# Altium PCB BOARD.PcbDoc
Units mm, origin at the board's own origin, x right, y up, seen from the top; angles counter-clockwise.
Board outline 50 x 40 mm, 2 copper layers (Top Layer, Bottom Layer), stack 1.061 mm thick; 81 components, 50 nets, 255 pads, 332 vias.
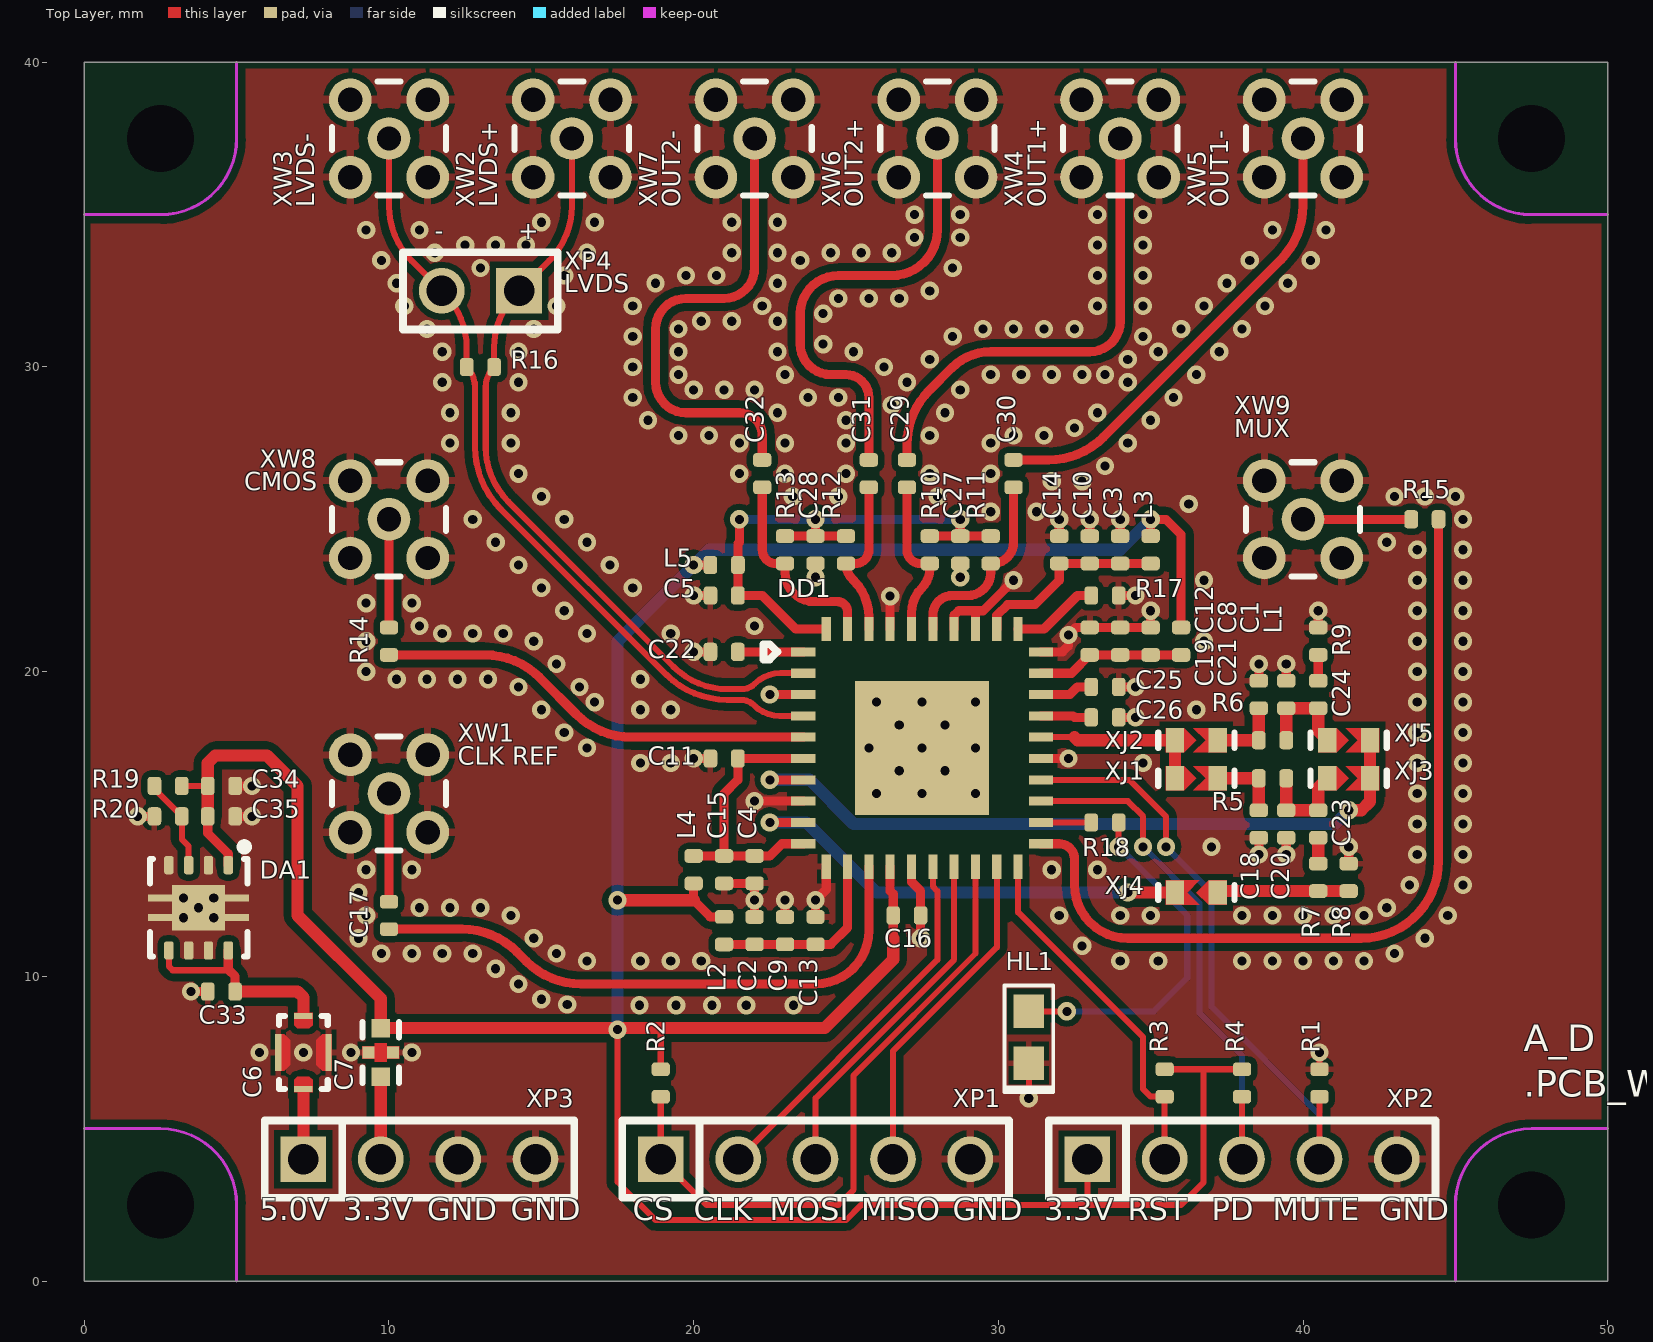
[diagram p0: Top Layer view]
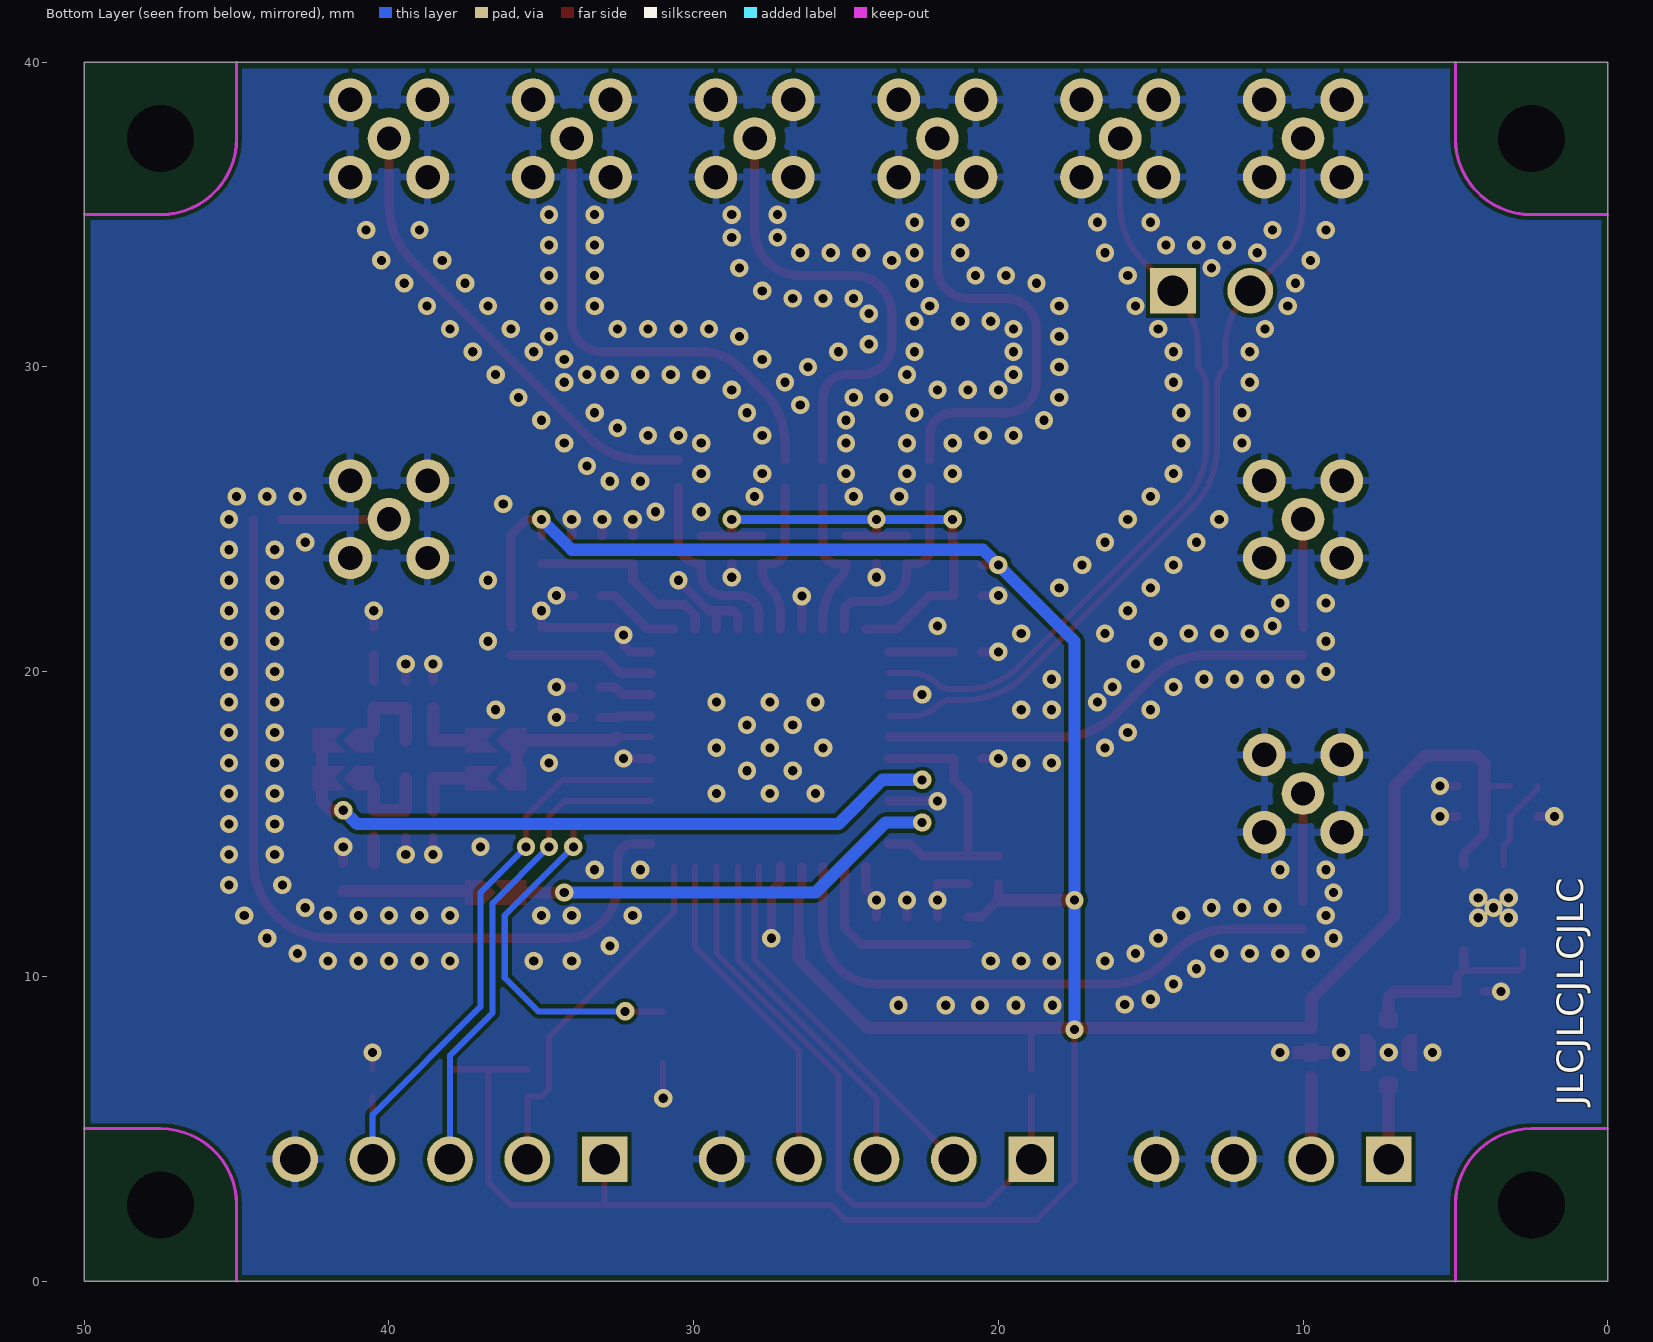
[diagram p1: Bottom Layer view, seen from below]
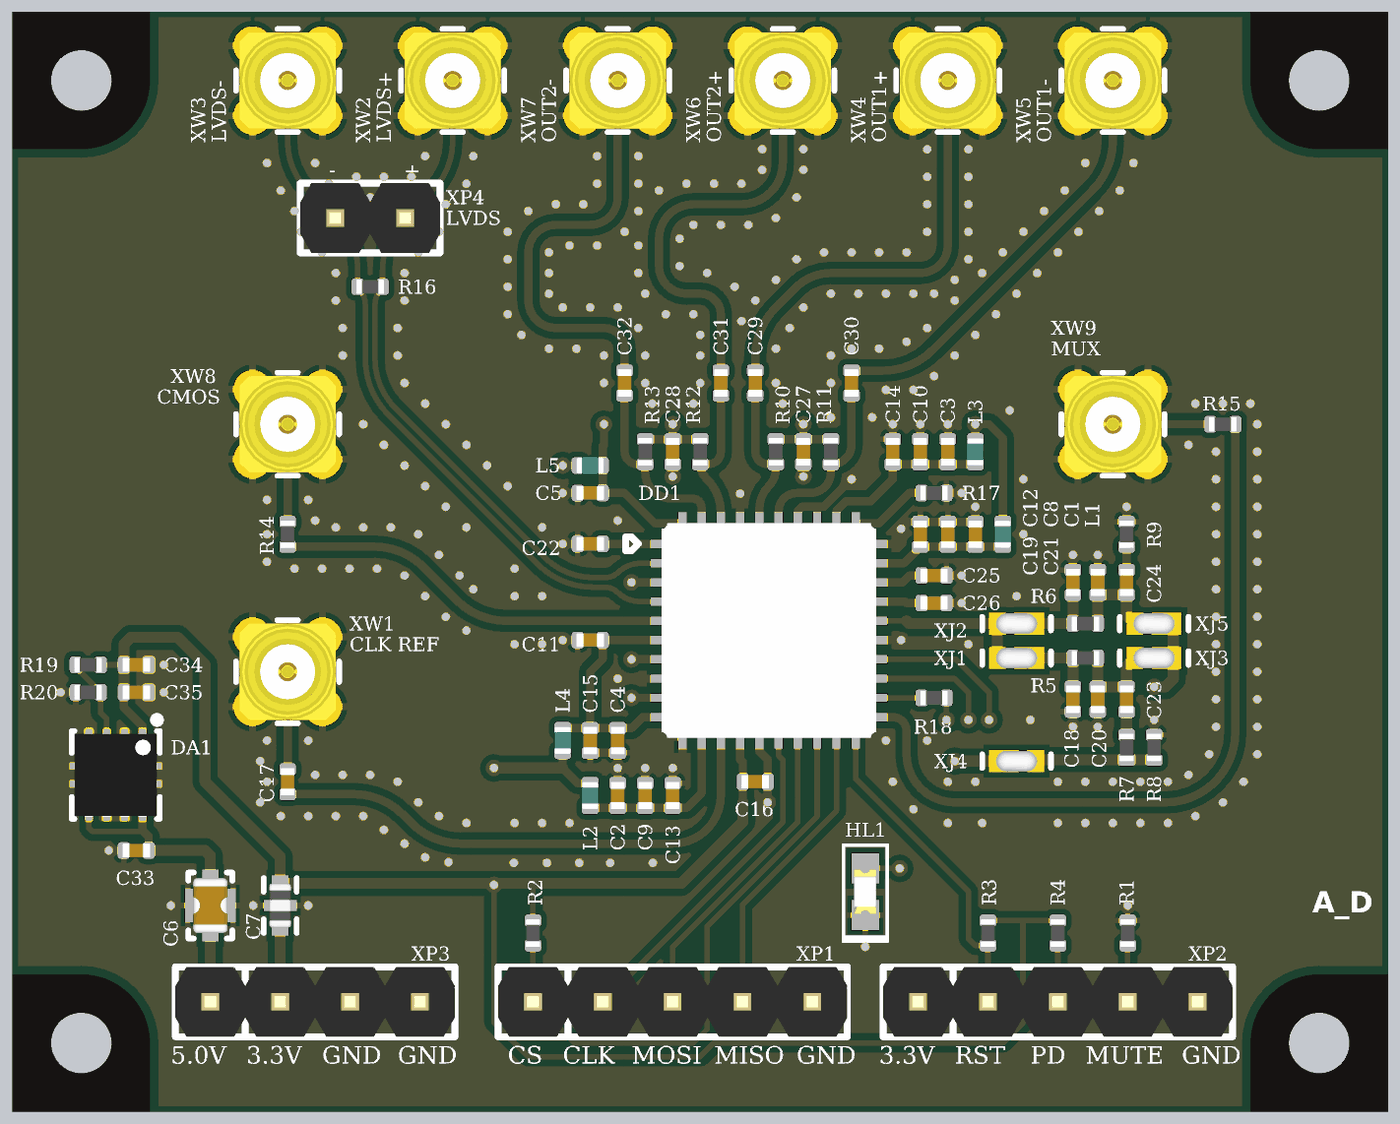
[diagram p2: 3D render of the assembled board from above, using the file's embedded part models]

## Layer stack, top to bottom
Top Solder: solder mask 0.01, Solder Resist, Dk 3.5
Top Layer: signal copper 0.0356
Dielectric1: core 0.99, KB-6160-0,99, Dk 4.6
Bottom Layer: signal copper 0.0356
Bottom Solder: solder mask 0.01, Solder Resist, Dk 3.5

## Board outline
0,0 0,40 50,40 50,0

## Design rules (kind name [scope] priority, off if disabled: settings)
BoardOutlineClearance [All] p1: gap=0.2 ignorepadtopadclearanceinfootprint=FALSE
Clearance Clearance_Top [OnLayer('Top Layer')] p1: gap=0.127 ignorepadtopadclearanceinfootprint=FALSE except(0.2: SMDPad-Fill SMDPad-Poly SMDPad-Region THPad-Fill THPad-Poly THPad-Region Via-Fill Via-Poly Via-Region Fill-Fill Fill-Poly Fill-Region Poly-Poly Poly-Region Region-Region; 0.25: Arc-Fill Arc-Poly Arc-Region Track-Fill Track-Poly Track-Region)
Clearance [All] p2: gap=0.127 ignorepadtopadclearanceinfootprint=FALSE
ComponentClearance [All] p1 off: gap=0.25 collisioncheckmode=3 verticalgap=0.25 showdistances=FALSE
DiffPairsRouting [All] p1: maxlimit=0.15 minlimit=0.15 mostfreqgap=0.15 toplayer_minwidth=0.2 toplayer_maxwidth=0.2 toplayer_prefwidth=0.2 bottomlayer_minwidth=0.2 bottomlayer_maxwidth=0.2 bottomlayer_prefwidth=0.2 impedanceprofiledriven=TRUE impedanceprofileid={279581DC-196B-4635-8583-721C73297865} impedanceprofilevalue=100.000000 maxuncoupledlength=35
Height [All] p1: minheight=0 maxheight=25 prefheight=25
HoleSize [All] p1: absolutevalues=TRUE maxlimit=6 minlimit=0.3 maxpercent=80.000 minpercent=20.000
HoleToHoleClearance [All] p1: gap=0.25 allowstackedmicrovias=TRUE
MatchedLengths MatchedLengths_COUT [InNetClass('COUT')] p1: tolerance=0.5 checknetsindiffpair=FALSE checkdiffpairvsdiffpair=TRUE checkxsignals=TRUE checkothers=TRUE
MatchedLengths MatchedLengths_LCD [InDifferentialPairClass('LCD')] p2: tolerance=5 checknetsindiffpair=FALSE checkdiffpairvsdiffpair=TRUE checkxsignals=TRUE checkothers=TRUE
MatchedLengths MatchedLengths_MIPI [InDifferentialPairClass('MIPI')] p3: tolerance=5 checknetsindiffpair=FALSE checkdiffpairvsdiffpair=TRUE checkxsignals=TRUE checkothers=TRUE
MatchedLengths [InDifferentialPairClass('All Differential Pairs')] p4: tolerance=3 checknetsindiffpair=TRUE checkdiffpairvsdiffpair=FALSE checkxsignals=FALSE checkothers=FALSE
MinimumSolderMaskSliver [All] p1 off: minsoldermaskwidth=0.254
PlaneClearance [All] p1: clearance=0.5
PlaneConnect [All] p1: planeconnectstyle=Relief reliefexpansion=0.5 reliefentries=4 reliefconductorwidth=0.25 reliefairgap=0.25
PolygonConnect PolygonConnect_DirectConnect [InComponentClass('DirectConnect')] p1: connectstyle=Direct reliefconductorwidth=0.254 reliefentries=4 polygonreliefangle="90 Angle" airgapwidth=0.254
PolygonConnect [All] p2: thpad.connectstyle=Relief thpad.reliefconductorwidth=0.25 thpad.reliefentries=4 thpad.polygonreliefangle="90 Angle" thpad.airgapwidth=0.2 smdpad.connectstyle=Relief smdpad.reliefconductorwidth=0.2 smdpad.reliefentries=4 smdpad.polygonreliefangle="90 Angle" smdpad.airgapwidth=0.15 via.connectstyle=Direct via.reliefconductorwidth=0.254 via.reliefentries=4 via.polygonreliefangle="90 Angle" via.airgapwidth=0.254
RoutingCorners [All] p1: cornerstyle=45-Degree minsetback=1.5 maxsetback=3.5
RoutingVias [All] p1: holewidth=0.6 width=1.2 viastyle="Through Hole" minholewidth=0.3 minwidth=0.5 maxholewidth=1 maxwidth=2
SMDEntry [All] p1: side=TRUE corner=TRUE anyangle=TRUE
SilkToSilkClearance [All] p1 off: silktosilkclearance=0.254
SilkToSolderMaskClearance [IsPad] p1 off: minsilkscreentomaskgap=0.254 clearancetoexposedcopper=TRUE
SolderMaskExpansion [All] p1: expansion=0.025
Width Width_50 [InNetClass('50OHM')] p1: maxlimit=1.3 minlimit=0.3 preferedwidth=0.3 minimp=50.000000 maximp=50.000000 favimp=50.000000
Width [All] p2: maxlimit=8 minlimit=0.15 preferedwidth=0.6
Width Width_TrackEnds [All] p3 off: maxlimit=0.25 minlimit=0.25 preferedwidth=0.25 checkconnectedcopper=TRUE
19 further rules are at their usual default settings.

## Classes and differential pairs
net class COUT: COUT1_N COUT1_P COUT2_N COUT2_P
net class SPI: SPI_CLK SPI_CS_N SPI_MISO SPI_MOSI
component class DirectConnect: C34 C35 DA1
differential pair class OUT: OUT1 OUT2 OUT_LVDS
net class 50OHM: CLK_REF COUT1_N COUT1_P COUT2_N COUT2_P NetC17_1 OUT1_N OUT1_P OUT2_N OUT2_P OUT_CMOS OUT_CMOS_C OUT_MUX OUT_MUX_C
differential pair OUT_LVDS: +OUT_LVDS_P -OUT_LVDS_N

## Components (designator, comment, footprint, x,y, rotation, side; value= is the part's Value field where it differs from the comment)
C1 "Capacitor" C0402_L 35,21 r270 top value=1uF
C2 "Capacitor" C0402_L 22,11.5 r270 top value=1uF
C3 "Capacitor" C0402_L 34,24 r270 top value=1uF
C4 "Capacitor" C0402_L 22,13.5 r90 top value=1uF
C5 "Capacitor" C0402_L 21,22.5 r0 top value=1uF
C6 "CAP-FT_123" NFM21PC 7.19,7.5 r90 top value=0.47uF
C7 "CAP-FT_123" NFM18PC_H080-Series 9.73,7.5 r90 top value=1.0uF
C8 "Capacitor" C0402_L 34,21 r270 top value=0.1uF
C9 "Capacitor" C0402_L 23,11.5 r270 top value=0.1uF
C10 "Capacitor" C0402_L 33,24 r270 top value=0.1uF
C11 "Capacitor" C0402_L 21,17.15 r0 top value=0.1uF
C12 "Capacitor" C0402_L 33,21 r270 top value=0.01uF
C13 "Capacitor" C0402_L 24,11.5 r270 top value=100pF
C14 "Capacitor" C0402_L 32,24 r270 top value=100pF
C15 "Capacitor" C0402_L 21,13.5 r90 top value=100pF
C16 "Capacitor" C0402_L 27,12 r180 top value=1uF
C17 "Capacitor" C0402_L 10,12 r90 top value=0.1uF
C18 "Capacitor" C0402_L 38.55,15 r90 top value=470pF
C19 "Capacitor" C0402_L 38.55,19.25 r270 top value=470pF
C20 "Capacitor" C0402_L 39.45,15 r90 top value=470pF
C21 "Capacitor" C0402_L 39.45,19.25 r270 top value=3300pF
C22 "Capacitor" C0402_L 21,20.65 r0 top value=0.01uF
C23 "Capacitor" C0402_L 40.5,15 r90 top value=0.033uF
C24 "Capacitor" C0402_L 40.5,19.25 r270 top value=0.1uF
C25 "Capacitor" C0402_L 33.5,19.5 r180 top value=0.1uF
C26 "Capacitor" C0402_L 33.5,18.5 r180 top value=0.1uF
C27 "Capacitor" C0402_L 28.75,24 r90 top value=0.01uF
C28 "Capacitor" C0402_L 24,24 r90 top value=0.01uF
C29 "Capacitor" C0402_L 27,26.5 r270 top value=0.01uF
C30 "Capacitor" C0402_L 30.5,26.5 r270 top value=0.01uF
C31 "Capacitor" C0402_L 25.75,26.5 r270 top value=0.01uF
C32 "Capacitor" C0402_L 22.25,26.5 r270 top value=0.01uF
C33 "Capacitor" C0402_L 4.5,9.5 r0 top value=1uF
C34 "Capacitor" C0402_L 4.5,16.25 r180 top value=4.7uF
C35 "Capacitor" C0402_L 4.5,15.25 r180 top value=4.7uF
DA1 "TPS73501DRB" VSON-8_065P300X300X100_N 3.75,12.25 r180 top value=TPS73501DRBR
DD1 "1508МТ015" 5164.40-1H3 27.5,17.5 r270 top locked
HL1 "Text" LD0603 31,8 r270 top value=BL-LS0603GC
L1 "FerriteBead" L0402_L 36,21 r270 top value=BLM15HD102SN1D
L2 "FerriteBead" L0402_L 21,11.5 r270 top value=BLM15HD102SN1D
L3 "FerriteBead" L0402_L 35,24 r270 top value=BLM15HD102SN1D
L4 "FerriteBead" L0402_L 20,13.5 r90 top value=BLM15HD102SN1D
L5 "FerriteBead" L0402_L 21,23.5 r0 top value=BLM15HD102SN1D
R1 "Resistor" R0402_L 40.54,6.5 r90 top value=100k
R2 "Resistor" R0402_L 18.92,6.5 r90 top value=100k
R3 "Resistor" R0402_L 35.46,6.5 r90 top value=100k
R4 "Resistor" R0402_L 38,6.5 r90 top value=100k
R5 "Resistor" R0402_L 39,16.5 r0 top value=1k
R6 "Resistor" R0402_L 39,17.75 r0 top value=1k
R7 "Resistor" R0402_L 40.5,13.25 r90 top value=499
R8 "Resistor" R0402_L 41.5,13.25 r270 top value=1k
R9 "Resistor" R0402_L 40.5,21 r270 top value=499
R10 "Resistor" R0402_L 27.75,24 r90 top value=49.9
R11 "Resistor" R0402_L 29.75,24 r90 top value=49.9
R12 "Resistor" R0402_L 25,24 r90 top value=49.9
R13 "Resistor" R0402_L 23,24 r90 top value=49.9
R14 "Resistor" R0402_L 10,21 r90 top value=100
R15 "Resistor" R0402_L 44,25 r180 top value=100
R16 "Resistor" R0402_L 13,30 r0 top value=100
R17 "Resistor" R0402_L 33.5,22.5 r180 top value=5.1k
R18 "Resistor" R0402_L 33.5,15.05 r180 top value=1k
R19 "Resistor" R0402_L 2.75,16.25 r0 top value=22.1k
R20 "Resistor" R0402_L 2.75,15.25 r0 top value=12k
XJ1 "Text" JS-S0603-2x 36.5,16.5 r0 top value=SolderJumper-SMT
XJ2 "Text" JS-S0603-2x 36.5,17.75 r0 top value=SolderJumper-SMT
XJ3 "Text" JS-S0603-2x 41.5,16.5 r0 top value=SolderJumper-SMT
XJ4 "Text" JS-S0603-2x 36.5,12.75 r180 top value=SolderJumper-SMT
XJ5 "Text" JS-S0603-2x 41.5,17.75 r0 top value=SolderJumper-SMT
XP1 "SPI" PLS-5 24,4 r0 top value=PLS-5
XP2 "CTRL" PLS-5 38,4 r0 top value=PLS-5
XP3 "POWER" PLS-4 11,4 r0 top value=PLS-4
XP4 "LVDS" PLS-2 13,32.5 r180 top value=PLS-2
XW1 "CLK REF" MMCX-J-ST-TH1 10,16 r0 top value=MMCX-J-H-ST-TH1
XW2 "LVDS+" MMCX-J-ST-TH1 16,37.5 r0 top value=MMCX-J-H-ST-TH1
XW3 "LVDS-" MMCX-J-ST-TH1 10,37.5 r0 top value=MMCX-J-H-ST-TH1
XW4 "OUT1+" MMCX-J-ST-TH1 34,37.5 r0 top value=MMCX-J-H-ST-TH1
XW5 "OUT1-" MMCX-J-ST-TH1 40,37.5 r0 top value=MMCX-J-H-ST-TH1
XW6 "OUT2+" MMCX-J-ST-TH1 28,37.5 r0 top value=MMCX-J-H-ST-TH1
XW7 "OUT2-" MMCX-J-ST-TH1 22,37.5 r0 top value=MMCX-J-H-ST-TH1
XW8 "CMOS" MMCX-J-ST-TH1 10,25 r0 top value=MMCX-J-H-ST-TH1
XW9 "MUX" MMCX-J-ST-TH1 40,25 r0 top value=MMCX-J-H-ST-TH1

## Footprints (in the part's own frame and the unit in brackets; to place one, negate y for a bottom-side part, rotate by r counter-clockwise, add the part's x,y. Pads: shape width x height; smd on the part's side, far side on the other; paste and mask are expansions set on the pad)
5164.40-1H3 [mm]
  rect 0.3x0.8 smd: 1(-3.15,-3.9) 2(-2.45,-3.9) 3(-1.75,-3.9) 4(-1.05,-3.9) 5(-0.35,-3.9) 6(0.35,-3.9) 7(1.05,-3.9) 8(1.75,-3.9) 9(2.45,-3.9) 10(3.15,-3.9) 21(3.15,3.9) 22(2.45,3.9) 23(1.75,3.9) 24(1.05,3.9) 25(0.35,3.9) 26(-0.35,3.9) 27(-1.05,3.9) 28(-1.75,3.9) 29(-2.45,3.9) 30(-3.15,3.9)
  rect 0.8x0.3 smd: 11(3.9,-3.15) 12(3.9,-2.45) 13(3.9,-1.75) 14(3.9,-1.05) 15(3.9,-0.35) 16(3.9,0.35) 17(3.9,1.05) 18(3.9,1.75) 19(3.9,2.45) 20(3.9,3.15) 31(-3.9,3.15) 32(-3.9,2.45) 33(-3.9,1.75) 34(-3.9,1.05) 35(-3.9,0.35) 36(-3.9,-0.35) 37(-3.9,-1.05) 38(-3.9,-1.75) 39(-3.9,-2.45) 40(-3.9,-3.15)
  rect 4.4x4.4 smd: TP(0,0)
  silkscreen extent -3.4,-5.21 -2.9,-4.75, body extent -3.9,-3.9 3.9,3.9, height 1.96
C0402_L [mm] "Chip Capacitor; Body 1.0 x 0.5 mm (LxW typ)"
  rrect50% 0.45x0.6 smd: 1(-0.45,0) 2(0.45,0)
  body extent -0.5,-0.25 0.5,0.25, height 0.61
JS-S0603-2x [mm] "Solder Jumper with square areas"
  rect 0.6x0.8 smd paste-1: 1(-0.7,0) 2(0.7,0)
  Top Layer region: -1,-0.4 -1,0.4 -0.4,0.4 0,0 -0.4,-0.4
  Top Layer region: -0.1,-0.4 0.3,0 -0.1,0.4 1,0.4 1,-0.4
  silkscreen extent -1.25,-0.25 1.25,0.25, body extent -0.75,-0.37 0.75,0.38, height 0.38
L0402_L [mm] "Chip Coil; Body 1.0 x 0.5 mm (LxW typ)"
  rrect50% 0.45x0.6 smd: 1(-0.452,0) 2(0.452,0)
  body extent -0.5,-0.3 0.5,0.3, height 0.5
LD0603 [mm]
  rect 1.1x1 smd: 1(-0.85,0) 2(0.85,0)
  silkscreen extent -1.7,-0.8 1.8,0.8, body extent -0.8,-0.4 0.8,0.4, height 0.7
MMCX-J-ST-TH1 [mm]
  round 1.4 hole 0.8: 1(0,0) 2(-1.27,-1.27) 2(-1.27,1.27) 2(1.27,-1.27) 2(1.27,1.27)
  silkscreen extent -1.88,-1.88 1.88,1.88, body extent -1.75,-1.75 1.75,1.75, height 4.45
NFM18PC_H080-Series [mm] "0603 size chip 3-terminal capacitor for power lines"
  rect 0.6x0.6 smd: 1(-0.8,0) 3(0.8,0)
  rect 0.4x0.4 smd: 2(0,0.4) 2(0,-0.4)
  Top Layer region: -0.2,0.6 0.2,0.6 0.2,0.2 0.3,0.2 0.3,-0.2 0.2,-0.2 0.2,-0.6 -0.2,-0.6 -0.2,-0.2 -0.3,-0.2 -0.3,0.2 -0.2,0.2
  silkscreen extent -1,-0.6 1,0.6, body extent -0.8,-0.4 0.8,0.4, height 0.82
NFM21PC [mm] "0805 size chip 3-terminal capacitor for power lines"
  rect 0.2x0.6 smd: 1(-1.2,0) 3(1.2,0)
  rect 1.2x0.2 smd: 2(0,0.825) 2(0,-0.825)
  Top Layer region: -0.6,0.625 -0.4,0.425 0.4,0.425 0.6,0.625 0.6,0.925 -0.6,0.925
  Top Layer region: 0.6,-0.625 0.4,-0.425 -0.4,-0.425 -0.6,-0.625 -0.6,-0.925 0.6,-0.925
  Top Layer region: -0.9,-0.3 -1.3,-0.3 -1.3,0.3 -0.9,0.3 -0.8,0.2 -0.8,-0.2
  Top Layer region: 0.9,0.3 1.3,0.3 1.3,-0.3 0.9,-0.3 0.8,-0.2 0.8,0.2
  silkscreen extent -1.2,-0.8 1.2,0.8, body extent -1,-0.62 1,0.63, height 0.85
PLS-2 [mm]
  rect 1.5x1.5 hole 1: 1(-1.27,0)
  round 1.5 hole 1: 2(1.27,0)
  silkscreen extent -2.54,-1.27 2.54,1.27, body extent -2.54,-1.27 2.54,1.27, height 8.9
PLS-4 [mm]
  rect 1.5x1.5 hole 1: 1(-3.81,0)
  round 1.5 hole 1: 2(-1.27,0) 3(1.27,0) 4(3.81,0)
  silkscreen extent -5.08,-1.27 5.08,1.27, body extent -5.08,-1.27 5.08,1.27, height 8.9
PLS-5 [mm]
  rect 1.5x1.5 hole 1: 1(-5.08,0)
  round 1.5 hole 1: 2(-2.54,0) 3(0,0) 4(2.54,0) 5(5.08,0)
  silkscreen extent -6.35,-1.27 6.35,1.27, body extent -6.35,-1.27 6.35,1.27, height 8.9
R0402_L [mm] "Chip Resistor; Body 1.0 x 0.5 mm (LxW typ)"
  rrect50% 0.45x0.6 smd: 1(-0.45,0) 2(0.45,0)
  body extent -0.5,-0.26 0.5,0.26, height 0.36
VSON-8_065P300X300X100_N [mm]
  rrect50% 0.31x0.6 smd paste-0.025: 1(-0.975,-1.4) 2(-0.325,-1.4) 3(0.325,-1.4) 4(0.975,-1.4) 5(0.975,1.4) 6(0.325,1.4) 7(-0.325,1.4) 8(-0.975,1.4)
  rect 0.825x0.23 smd: TP(-1.25,-0.325) TP(-1.25,0.325) TP(1.25,-0.325) TP(1.25,0.325)
  rect 1.75x1.5 smd: TP(0,0)
  silkscreen extent -1.63,-2.12 1.6,1.6, body extent -1.52,-1.52 1.52,1.52, height 1.04

## Part data
C1 C2 C3 C4 C5 C16 C33: library part GRM155C71A105KE11D, Dielectric Type=X7S, Manufacturer=Murata, Schematic Value="1uF, 10V, X7S", Tolerance=±10%, Voltage=10V, Working Temperature Max=+125°С, Working Temperature Min=-55°С, Application Category=1, ID=179, Part Number=GRM155C71A105KE11D, Published=18.05.2010, Publisher="Andrew Danich", Type=Конденсатор
C6: library part NFM21PC474R1C3D, Current Rating=2A, Manufacturer=Murata, Tolerance=±20%, Voltage Rating DC=16V, Working Temperature Max=+125°C, Working Temperature Min=-55°C, Application Category=1, Channels=1, Functional Analog=NFM21PC474R1C3B, ID=6, Part Number=NFM21PC474R1C3D, Published=04.11.2018, Publisher="Viktor Klishin", Type=Конденсатор
C7: library part NFM18PC105R0J3D, Current Rating=4A, Manufacturer=Murata, Tolerance=±20%, Voltage Rating DC=6.3V, Working Temperature Max=+125°C, Working Temperature Min=-55°C, Application Category=1, Channels=1, Functional Analog=NFM18PC105R0J3B, ID=4, Part Number=NFM18PC105R0J3D, Published=04.11.2018, Publisher="Viktor Klishin", Type=Конденсатор
C8 C9 C10 C11 C17 C24 C25 C26: library part GCM155R71C104KA55D, Dielectric Type=X7R, Manufacturer=Murata, Schematic Value="0.1uF, 16V, X7R", Tolerance=±10%, Voltage=16V, Working Temperature Max=+125°С, Working Temperature Min=-55°С, Application Category=1, Functional Analog=GRM155R71C104KA88D, ID=163, Part Number=GCM155R71C104KA55D, Published=18.05.2010, Publisher="Andrew Danich", Type=Конденсатор
C12 C22 C27 C28 C29 C30 C31 C32: library part GCM155R71E103KA37D, Dielectric Type=X7R, Manufacturer=Murata, Schematic Value="0.01uF, 25V, X7R", Tolerance=±10%, Voltage=25V, Working Temperature Max=+125°С, Working Temperature Min=-55°С, Application Category=1, Functional Analog=GRM155R71E103KA01D, ID=150, Part Number=GCM155R71E103KA37D, Published=18.05.2010, Publisher="Andrew Danich", Type=Конденсатор
C13 C14 C15: library part GCM1555C1H101FA16D, Dielectric Type=NP0, Manufacturer=Murata, Schematic Value="100pF, 50V, NP0", Tolerance=±1%, Voltage=50V, Working Temperature Max=+125°С, Working Temperature Min=-55°С, Application Category=1, Functional Analog=GRM1555C1H101JA01D, ID=164, Part Number=GCM1555C1H101FA16D, Published=18.05.2010, Publisher="Andrew Danich", Type=Конденсатор
C18 C19 C20: library part GRM1555C1H471JA01D, Dielectric Type=NP0, Manufacturer=Murata, Schematic Value="470pF, 50V, NP0", Tolerance=±5%, Voltage=50V, Working Temperature Max=+125°С, Working Temperature Min=-55°С, Application Category=1, ID=185, Part Number=GRM1555C1H471JA01D, Published=18.05.2010, Publisher="Andrew Danich", Type=Конденсатор
C21: library part GRM155R71H332KA01D, Dielectric Type=X7R, Manufacturer=Murata, Schematic Value="3300pF, 50V, X7R", Tolerance=±10%, Voltage=50V, Working Temperature Max=+125°С, Working Temperature Min=-55°С, Application Category=1, ID=166, Part Number=GRM155R71H332KA01D, Published=18.05.2010, Publisher="Andrew Danich", Type=Конденсатор
C23: library part GCM155R71E333KA55D, Dielectric Type=X7R, Manufacturer=Murata, Schematic Value="0.033uF, 25V, X7R", Tolerance=±10%, Voltage=25V, Working Temperature Max=+125°С, Working Temperature Min=-55°С, Application Category=1, Functional Analog=GRM155R71A333KA01D, ID=182, Part Number=GCM155R71E333KA55D, Published=18.05.2010, Publisher="Andrew Danich", Type=Конденсатор
C34 C35: library part GRM155R60J475ME87D, Dielectric Type=X5R, Manufacturer=Murata, Schematic Value="4.7uF, 6.3V, X5R", Tolerance=±20%, Voltage=6.3V, Working Temperature Max=+85°С, Working Temperature Min=-55°С, Application Category=1, ClassName=DirectConnect, ID=223, Part Number=GRM155R60J475ME87D, Published=18.05.2010, Publisher="Andrew Danich", Type=Конденсатор
DA1: library part TPS73501DRBR, Input Voltage=+2.2…5.5V, Manufacturer="Texas Instruments", Output Current=500mA, Output Voltage=+1.2…5.5V, Working Temperature Max=+125°С, Working Temperature Min=-40°С, Application Category=1, ClassName=DirectConnect, Functional Analog=TPS73501DRBT, ID=27, Part Number=TPS73501DRBR, Published=25.03.2019, Publisher="Andrew Danich", RMS Noise=13.2uV, Type=Микросхема
DD1: Manufacturer=Миландр, Supply Current=+320mA, Working Temperature Max=+85°С, Working Temperature Min=-60°С, Application Category=5, Bandwidth=6GHz, Functional Analog=К1508МТ015, ID=1, Part Number=1508МТ015, Published=14.08.2020, Publisher="Andrew Danich", Specification="АЕНВ.431230.569 ТУ", Supply Operation=+3.0…3.6V, Type=Микросхема
HL1: library part BL-LS0603GC, Color=Green, Forward Current=30mA, Forward Voltage=2.3V, Power Dissipation=65mW, Application Category=1, ID=14, Leds=1, Part Number=BL-LS0603GC, Published=03.12.2013, Publisher="Andrew Danich", Type="Индикатор единичный"
L1 L2 L3 L4 L5: library part BLM15HD102SN1D, DC Resistance=1.25ohm, Inductor Type=EMIFIL, Manufacturer=Murata, Rated Current=250mA, Schematic Value="1000ohm ±25%", Tolerance=±25%, Working Temperature Max=+125°С, Working Temperature Min=-55°С, Application Category=1, ID=7, Impedance at 100Mhz=1000ohm, Part Number=BLM15HD102SN1D, Published=14.11.2014, Publisher="Andrew Danich", Type=Дроссель
R1 R2 R3 R4: library part RC0402JR-07100KL, Limit Voltage=50V, Manufacturer=Yageo, Schematic Value="100k ±5%", Temperature Coefficient=100ppm, Tolerance=±5%, Total Power Dissipation=0.1W, Working Temperature Max=+155°С, Working Temperature Min=-55°С, Application Category=1, ID=351, Part Number=RC0402JR-07100KL, Published=24.03.2010, Publisher="Andrew Danich", Series Type=Thick-Film, Type=Резистор
R5 R6 R8: library part RC0402FR-071KL, Limit Voltage=50V, Manufacturer=Yageo, Schematic Value="1k ±1%", Temperature Coefficient=100ppm, Tolerance=±1%, Total Power Dissipation=0.1W, Working Temperature Max=+155°С, Working Temperature Min=-55°С, Application Category=1, ID=492, Part Number=RC0402FR-071KL, Published=24.03.2010, Publisher="Andrew Danich", Series Type=Thick-Film, Type=Резистор
R7 R9: library part RC0402FR-07499RL, Limit Voltage=50V, Manufacturer=Yageo, Schematic Value="499 ±1%", Temperature Coefficient=100ppm, Tolerance=±1%, Total Power Dissipation=0.1W, Working Temperature Max=+155°С, Working Temperature Min=-55°С, Application Category=1, ID=549, Part Number=RC0402FR-07499RL, Published=24.03.2010, Publisher="Andrew Danich", Series Type=Thick-Film, Type=Резистор
R10 R11 R12 R13: library part RC0402FR-0749R9L, Limit Voltage=50V, Manufacturer=Yageo, Schematic Value="49.9 ±1%", Temperature Coefficient=100ppm, Tolerance=±1%, Total Power Dissipation=0.1W, Working Temperature Max=+155°С, Working Temperature Min=-55°С, Application Category=1, ID=491, Part Number=RC0402FR-0749R9L, Published=24.03.2010, Publisher="Andrew Danich", Series Type=Thick-Film, Type=Резистор
R14 R15 R16: library part RC0402FR-07100RL, Limit Voltage=50V, Manufacturer=Yageo, Schematic Value="100 ±1%", Temperature Coefficient=100ppm, Tolerance=±1%, Total Power Dissipation=0.1W, Working Temperature Max=+155°С, Working Temperature Min=-55°С, Application Category=1, ID=457, Part Number=RC0402FR-07100RL, Published=24.03.2010, Publisher="Andrew Danich", Series Type=Thick-Film, Type=Резистор
R17: library part RC0402FR-075K1L, Limit Voltage=50V, Manufacturer=Yageo, Schematic Value="5.1k ±1%", Temperature Coefficient=100ppm, Tolerance=±1%, Total Power Dissipation=0.1W, Working Temperature Max=+155°С, Working Temperature Min=-55°С, Application Category=1, ID=496, Part Number=RC0402FR-075K1L, Published=24.03.2010, Publisher="Andrew Danich", Series Type=Thick-Film, Type=Резистор
R18: library part RC0402JR-071KL, Limit Voltage=50V, Manufacturer=Yageo, Schematic Value="1k ±5%", Temperature Coefficient=100ppm, Tolerance=±5%, Total Power Dissipation=0.1W, Working Temperature Max=+155°С, Working Temperature Min=-55°С, Application Category=1, ID=3, Part Number=RC0402JR-071KL, Published=24.03.2010, Publisher="Andrew Danich", Series Type=Thick-Film, Type=Резистор
R19: library part RC0402FR-0722K1L, Limit Voltage=50V, Manufacturer=Yageo, Schematic Value="22.1k ±1%", Temperature Coefficient=100ppm, Tolerance=±1%, Total Power Dissipation=0.1W, Working Temperature Max=+155°С, Working Temperature Min=-55°С, Application Category=1, ID=447, Part Number=RC0402FR-0722K1L, Published=24.03.2010, Publisher="Andrew Danich", Series Type=Thick-Film, Type=Резистор
R20: library part RC0402FR-0712KL, Limit Voltage=50V, Manufacturer=Yageo, Schematic Value="12k ±1%", Temperature Coefficient=100ppm, Tolerance=±1%, Total Power Dissipation=0.1W, Working Temperature Max=+155°С, Working Temperature Min=-55°С, Application Category=1, ID=318, Part Number=RC0402FR-0712KL, Published=24.03.2010, Publisher="Andrew Danich", Series Type=Thick-Film, Type=Резистор
XJ1 XJ2 XJ3 XJ4 XJ5: library part SolderJumper-SMT, Application Category=1, Application Type="SMT Jumper", ID=6, Part Number=SolderJumper-SMT, Published=20.08.2019, Publisher="Andrew Danich"
XP1 XP2: library part PLS-5, Limit Current=3A, Limit Voltage=250V, Resistance=15momh, Application Category=1, Connector Type=Male, ID=4, Part Number=PLS-5, Pins=5, Pitch=2.54mm, Published=07.03.2013, Publisher="Andrew Danich", Surface Finish=Gold, Type=Вилка
XP3: library part PLS-4, Limit Current=3A, Limit Voltage=250V, Resistance=15momh, Application Category=1, Connector Type=Male, ID=3, Part Number=PLS-4, Pins=4, Pitch=2.54mm, Published=07.03.2013, Publisher="Andrew Danich", Surface Finish=Gold, Type=Вилка
XP4: library part PLS-2, Limit Current=3A, Limit Voltage=250V, Resistance=15momh, Application Category=1, Connector Type=Male, ID=1, Part Number=PLS-2, Pins=2, Pitch=2.54mm, Published=07.03.2013, Publisher="Andrew Danich", Surface Finish=Gold, Type=Вилка
XW1 XW2 XW3 XW4 XW5 XW6 XW7 XW8 XW9: library part MMCX-J-H-ST-TH1, Frequency Band=6GHz, Limit Voltage=170V, Manufacturer=Samtec, Wave Resistance=50ohm, Working Temperature Max=+125°С, Working Temperature Min=-65°С, Application Category=1, Connector Type=Male, Functional Analog=MMCX-J, ID=7, Part Number=MMCX-J-H-ST-TH1, Pins=5, Published=19.09.2015, Publisher="НТЦ \"Вектор\"", Surface Finish=Gold, Type=Вилка

## Free pads (board coordinates)
  round 0 hole 2.2 unplated: MH1(2.5,2.5) MH1(2.5,37.5) MH1(47.5,2.5) MH1(47.5,37.5)

## Via types
v1: diameter 0.6, hole 0.3, Top Layer to Bottom Layer, tented both sides, 332 vias

## Nets (pads, with @x,y where several pads share a name; then routed paths per layer and width w, separated by ;. In a path a pad name is that pad's centre, name@x,y a point inside that pad or via, vN(x,y) a via of type N, cw(c..) or ccw(c..) an arc to the next point about the centre after c; other vN are vias at no path point)
CLK_REF: C17.2 XW1.1 | length 3.6
  Top Layer w0.3: C17.2 XW1.1
COUT1_N: C30.1 XW5.1 | length 15.6
  Top Layer w0.3: C30.1 31.648,26.95 ccw(c31.648,29.49) 33.444,27.694 39.256,33.506 ccw(c37.46,35.302) 40,35.302 XW5.1
COUT1_P: C29.1 XW4.1 | length 15.8
  Top Layer w0.3: C29.1 27,27.448 cw(c29.54,27.448) 27.744,29.244 28.47,29.97 ; 28.47,29.97 cw(c29.75,28.689) 29.75,30.5 33,30.5 ccw(c33,31.5) 34,31.5 XW4.1
COUT2_N: C32.1 XW7.1 | length 15.7
  Top Layer w0.3: XW7.1 22,33.25 cw(c21,33.25) 21,32.25 19.75,32.25 ccw(c19.75,31.25) 18.75,31.25 18.75,29.5 ccw(c19.75,29.5) 19.75,28.5 21.5,28.5 cw(c21.5,27.75) 22.25,27.75 C32.1
COUT2_P: C31.1 XW6.1 | length 15.4
  Top Layer w0.3: C31.1 25.75,29 ccw(c25,29) 25,29.75 24.5,29.75 cw(c24.5,30.75) 23.5,30.75 23.5,31.75 cw(c24.75,31.75) 24.75,33 26.5,33 ccw(c26.5,34.5) 28,34.5 XW6.1
GND: C1.1 C2.1 C3.1 C4.1 C5.1 C6.2 C7.2 C8.1 C9.1 C10.1 C11.1 C12.1 C13.1 C14.1 C15.1 C16.1 C18.1 C19.1 C20.1 C21.1 C22.1 C25.1 C26.1 C27.1 C28.1 C33.1 C34.1 C35.1 DA1.2 DA1.4 DA1.6 DA1.7 DA1.TP DD1.3 DD1.8 DD1.11 DD1.15 DD1.25 DD1.30 DD1.33 DD1.34 DD1.37 DD1.TP HL1.2 R1.2 R8.1 R9.1 R17.1 R20.1 XP1.5 XP2.5 XP3.3 XP3.4 XW1.2 XW2.2 XW3.2 XW4.2 XW5.2 XW6.2 XW7.2 XW8.2 XW9.2 | length 32.8
  Top Layer w0.2: v1(31,6) HL1.2 ; R1.2 v1(40.54,7.5)
  Top Layer w0.3: v1(1.75,15.25) R20.1 ; v1(3.5,9.5) C33.1 ; C35.1 v1(5.5,15.25) ; C34.1 v1(5.5,16.25) ; v1(20,17.15) C11.1 ; v1(20,20.65) C22.1 ; v1(20,22.5) C5.1 ; C15.1 C4.1 v1(22,12.5) C2.1 ; v1(22,15.75) DD1.8 ; v1(22.5,19.25) DD1.3@23.578,19.25 ; C9.1 v1(23,12.5) ; C13.1 v1(24,12.5) 24.35,12.85 DD1.11 ; v1(24,23.1) C28.1 ; DD1.37 v1(26.45,22.478) ; DD1.15 27.15,13.1 27.45,12.8 C16.1 v1(27.45,11.25) ; DD1.34 28.55,21.85 28.7,22 29.2,22 ; v1(28.75,23.1) C27.1 ; DD1.33 29.25,21.95 29.2,22 ; v1(30.5,23) 29.5,22 29.2,22 ; DD1.25 v1(32.3,17.15) ; DD1.30 32.1,20.65 32.3,20.85 v1(32.3,21.2) 32.55,21.45 C12.1 C8.1 C1.1 v1(35,22) ; C14.1 v1(32,25) ; C10.1 v1(33,25) ; C26.1 v1(34.5,18.5) ; C25.1 v1(34.5,19.5) ; R17.1 v1(34.5,22.5) ; C3.1 v1(34,25) ; v1(38.55,14) C18.1 ; C19.1 v1(38.55,20.25) ; v1(39.45,14) C20.1 ; C21.1 v1(39.45,20.25) ; R9.1 v1(40.5,22) ; R8.1 v1(41.5,14.25)
  other v1: 5.75,7.5 7.19,7.5 8.75,7.5 10.75,7.5 18.225,9.05 19.425,9.05 20.6,9.05 21.725,9.05 23.275,9.05 15.85,9.075 15,9.25 14.25,9.75 13.5,10.25 16.5,10.5 18.25,10.5 19.25,10.5 20.25,10.5 34,10.5 35.25,10.5 38,10.5 39,10.5 40,10.5 41,10.5 42,10.5 9.75,10.75 10.75,10.75 11.75,10.75 12.75,10.75 15.5,10.75 43,10.75 32.75,11 9,11.25 14.75,11.25 44,11.25 3.25,11.925 4.25,11.925 9.25,12 14,12 32,12 34,12 35,12 38,12 39,12 40,12 41,12 42,12 44.75,12 3.75,12.25 11,12.25 12,12.25 13,12.25 42.75,12.25 3.25,12.575 4.25,12.575 9,12.75 43.5,13 45.25,13 9.25,13.5 10.75,13.5 31.75,13.5 33.25,13.5 43.75,14 45.25,14 37,14.25 43.75,15 45.25,15 26,16 27.5,16 29.25,16 43.75,16 45.25,16 26.75,16.75 28.25,16.75 18.25,17 19.25,17 34.75,17 43.75,17 45.25,17 16.5,17.5 25.75,17.5 27.5,17.5 29.25,17.5 15.75,18 43.75,18 45.25,18 26.75,18.25 28.25,18.25 15,18.75 18.25,18.75 19.25,18.75 36.5,18.75 16.75,19 26,19 27.5,19 29.25,19 43.75,19 45.25,19 14.25,19.5 16.25,19.5 10.25,19.75 11.25,19.75 12.25,19.75 13.25,19.75 18.25,19.75 9.25,20 43.75,20 45.25,20 15.5,20.25 9.25,21 14.75,21 36.75,21 43.75,21 45.25,21 11.75,21.25 12.75,21.25 13.75,21.25 16.5,21.25 19.25,21.25 11,21.5 22,21.5 15.75,22 43.75,22 45.25,22 9.25,22.25 10.75,22.25 15,22.75 18,22.75 36.75,23 43.75,23 45.25,23 14.25,23.5 17.25,23.5 43.75,24 45.25,24 13.5,24.25 16.5,24.25 42.75,24.25 12.75,25 15.75,25 45.25,25 29.75,25.25 31.25,25.25 36.25,25.5 15,25.75 23.25,25.75 24.75,25.75 28,25.75 43,25.75 44,25.75 45,25.75 31.75,26.25 32.75,26.25 14.25,26.5 21.5,26.5 23,26.5 25,26.5 27.75,26.5 29.75,26.5 33.5,26.75 12,27.5 14,27.5 21.5,27.5 23,27.5 25,27.5 29.75,27.5 34.25,27.5 19.5,27.75 20.5,27.75 27.75,27.75 30.5,27.75 31.5,27.75 32.5,28 18.5,28.25 25,28.25 35,28.25 12,28.5 14,28.5 22.75,28.5 28.25,28.5 33.25,28.5 26.5,28.75 18,29 23.75,29 24.75,29 35.75,29 20,29.25 21,29.25 22,29.25 28.75,29.25 11.75,29.5 14.25,29.5 27,29.5 34.25,29.5 19.5,29.75 23,29.75 29.75,29.75 30.75,29.75 31.75,29.75 32.75,29.75 33.5,29.75 36.5,29.75 18,30 26.25,30 27.75,30.25 34.25,30.25 11.75,30.5 14.25,30.5 19.5,30.5 22.75,30.5 25.25,30.5 35.25,30.5 37.25,30.5 24.25,30.75 18,31 28.5,31 34.75,31 11.25,31.25 14.75,31.25 19.5,31.25 29.5,31.25 30.5,31.25 31.5,31.25 32.5,31.25 36,31.25 38,31.25 20.25,31.5 21.25,31.5 22.75,31.5 24.25,31.75 10.5,32 15.5,32 18,32 22.25,32 33.25,32 34.75,32 36.75,32 38.75,32 24.75,32.25 25.75,32.25 26.75,32.25 27.75,32.5 10.25,32.75 18.75,32.75 22.75,32.75 37.5,32.75 39.5,32.75 15.75,33 19.75,33 20.75,33 33.25,33 34.75,33 13,33.25 28.5,33.25 9.75,33.5 23.5,33.5 38.25,33.5 40.25,33.5 11.5,33.75 16.5,33.75 21.25,33.75 22.75,33.75 24.5,33.75 25.5,33.75 26.5,33.75 12.5,34 13.5,34 14.5,34 33.25,34 34.75,34 27.25,34.25 28.75,34.25 9.25,34.5 11,34.5 39,34.5 40.75,34.5 15,34.75 16.75,34.75 21.25,34.75 22.75,34.75 27.25,35 28.75,35 33.25,35 34.75,35
MUTE_OUT: DD1.24 R1.1 XP2.4 | length 20
  Top Layer w0.2: DD1.24 34.3,16.45 35.5,15.25 v1(35.5,14.25) ; XP2.4 R1.1
  Bottom Layer w0.2: v1(35.5,14.25) 37,12.75 37,9 40.54,5.46 XP2.4
NetC6_1: C6.1 XP3.1 | length 2.5
  Top Layer w0.4: XP3.1 C6.1 7.19,6.5
NetC7_1: C7.1 XP3.2 | length 2.7
  Top Layer w0.4: XP3.2 C7.1
NetC17_1: C17.1 DD1.13 | length 19.4
  Top Layer w0.3: C17.1 12.398,11.55 cw(c12.398,9.01) 14.194,10.806 14.506,10.494 ccw(c16.302,12.29) 16.302,9.75 24,9.75 ccw(c24,11.5) 25.75,11.5 DD1.13
NetC18_2: C18.2 R5.1 XJ1.2 | length 2.4
  Top Layer w0.4: XJ1.2 R5.1 C18.2
NetC19_2: C19.2 R6.1 XJ2.2 | length 2.4
  Top Layer w0.4: XJ2.2 R6.1 C19.2
NetC20_2: C20.2 C23.2 R5.2 XJ3.1 | length 3.3
  Top Layer w0.4: R5.2 C20.2 C23.2 40.5,16.2 XJ3.1
NetC21_2: C21.2 C24.2 R6.2 XJ5.1 | length 3.3
  Top Layer w0.4: R6.2 C21.2 C24.2 40.5,18.05 XJ5.1
NetC22_2: C22.2 DD1.1 | length 2.2
  Top Layer w0.3: C22.2 DD1.1
NetC23_1: C23.1 R7.2 | length 0.9
  Top Layer w0.4: R7.2 C23.1
NetC24_1: C24.1 R9.2 | length 0.9
  Top Layer w0.3: C24.1 R9.2
NetC25_2: C25.2 DD1.28 | length 1.8
  Top Layer w0.3: DD1.28 32.35,19.25 32.6,19.5 C25.2
NetC26_2: C26.2 DD1.27 | length 1.7
  Top Layer w0.3: DD1.27 32.45,18.55 32.5,18.5 C26.2
NetDA1_3: DA1.3 R19.1 R20.2 | length 3.1
  Top Layer w0.2: R19.1 2.3,16.15 R20.2 3.2,14.5 3.425,14.275 DA1.3
NetDD1_7: DD1.7 XJ3.2 XJ5.2 | length 23.7
  Top Layer w0.3: v1(22.5,16.45) DD1.7
  Top Layer w0.4: v1(41.5,15.45) 41.91,15.45 42.2,15.74 XJ3.2 XJ5.2
  Bottom Layer w0.4: v1(22.5,16.45) 23.8,16.45 25.25,15 41.05,15 v1(41.5,15.45)
NetDD1_9: DD1.9 XJ4.2 | length 15.4
  Top Layer w0.3: v1(22.5,15.05) DD1.9
  Top Layer w0.4: v1(34.25,12.75) XJ4.2
  Bottom Layer w0.4: v1(22.5,15.05) 23.7,15.05 26,12.75 v1(34.25,12.75)
NetDD1_22: DD1.22 R18.2 | length 1.7
  Top Layer w0.2: DD1.22 R18.2
NetDD1_26: DD1.26 XJ1.1 XJ2.1 | length 5.7
  Top Layer w0.2: DD1.26 32.5,17.85
  Top Layer w0.4: 32.5,17.85 32.6,17.75 XJ2.1 XJ1.1
NetDD1_31: DD1.31 R17.2 | length 2.9
  Top Layer w0.3: DD1.31 31.5,21.4 32.6,22.5 R17.2
NetHL1_1: HL1.1 R18.1 | length 11.7
  Top Layer w0.2: HL1.1 v1(32.25,8.85) ; v1(33.95,14.25) R18.1
  Bottom Layer w0.2: v1(32.25,8.85) 35.1,8.85 36.2,9.95 36.2,12 v1(33.95,14.25)
NetR7_1: R7.1 R8.2 XJ4.1 | length 4.3
  Top Layer w0.4: XJ4.1 37.25,12.8 R7.1 R8.2
OUT1_N: C30.2 DD1.35 R11.1 | length 6.4
  Top Layer w0.3: DD1.35 27.85,21.85 cw(c28.5,21.85) 28.5,22.5 29,22.5 ccw(c29,23.25) 29.75,23.25 R11.1 29.8,23.55 ccw(c29.8,24.25) 30.5,24.25 C30.2
OUT1_P: C29.2 DD1.36 R10.1 | length 5.4
  Top Layer w0.3: C29.2 27,24 ccw(c27.45,24) 27.45,23.55 R10.1 27.75,23.374 cw(c26.867,23.374) 27.75,23.37 cw(c26.867,23.374) 27.491,22.75 ccw(c28.316,21.926) 27.15,21.926 DD1.36
OUT2_N: C32.2 DD1.39 R13.1 | length 6.7
  Top Layer w0.3: C32.2 22.25,24 ccw(c22.7,24) 22.7,23.55 R13.1 23,23.25 ccw(c23.95,23.25) 23.95,22.3 24.721,22.3 cw(c24.721,21.971) 25.05,21.971 DD1.39
OUT2_P: C31.2 DD1.38 R12.1 | length 5.4
  Top Layer w0.3: DD1.38 25.75,21.793 ccw(c24.043,21.793) 25.25,23 25.212,23.038 cw(c25.724,23.55) R12.1 25.3,23.55 ccw(c25.3,24) 25.75,24 C31.2
OUT_CMOS: DD1.5 R14.1 | length 14.5
  Top Layer w0.3: R14.1 13.148,20.55 cw(c13.148,18.01) 14.944,19.806 16.156,18.594 ccw(c17.952,20.39) 17.952,17.85 DD1.5
OUT_CMOS_C: R14.2 XW8.1 | length 3.6
  Top Layer w0.3: R14.2 XW8.1
OUT_LVDS_N: DD1.4 R16.1 XP4.2 XW3.1 | length 25.8
  Top Layer w0.2: XW3.1 10,35.282 ccw(c12.54,35.282) 10.744,33.486 XP4.2 11.806,32.424 cw(c10.01,30.628) 12.55,30.628 R16.1 cw(c11.886,29.336) 12.825,29.336 12.825,27.376 ccw(c15.712,27.376) 13.671,25.335 19.099,19.906 ccw(c21.105,21.912) 21.101,19.075 ccw(c21.105,21.912) 21.105,19.075 21.555,19.075 cw(c21.555,18.478) 21.978,18.9 ccw(c22.823,19.745) 22.823,18.55 DD1.4@23.578,18.55
OUT_LVDS_P: DD1.2 R16.2 XP4.1 XW2.1 | length 25.3
  Top Layer w0.2: XW2.1 16,35.282 cw(c13.46,35.282) 15.256,33.486 XP4.1 14.194,32.424 ccw(c15.99,30.628) 13.45,30.628 R16.2 ccw(c14.114,29.336) 13.175,29.336 13.175,27.377 ccw(c15.715,27.377) 13.919,25.581 19.331,20.169 ccw(c21.127,21.965) 21.127,19.425 21.578,19.425 ccw(c21.578,20.022) 22,19.6 cw(c22.845,18.755) 22.845,19.95 DD1.2
OUT_MUX: DD1.21 R15.1 | length 27.8
  Top Layer w0.3: DD1.21 32,14.35 cw(c32,13.85) 32.5,13.85 32.5,13 ccw(c34.25,13) 34.25,11.25 41.91,11.25 ccw(c41.91,13.79) 44.45,13.79 R15.1
OUT_MUX_C: R15.2 XW9.1 | length 3.6
  Top Layer w0.3: XW9.1 R15.2
POWERDOWN_N: DD1.23 R4.1 XP2.3 | length 18.2
  Top Layer w0.2: DD1.23 34.25,15.75 34.75,15.25 v1(34.75,14.25) ; XP2.3 R4.1
  Bottom Layer w0.2: v1(34.75,14.25) 36.6,12.4 36.6,8.8 38,7.4 XP2.3
RESET_N: DD1.20 R3.1 XP2.2 | length 11.9
  Top Layer w0.2: DD1.20 30.65,12.1 34.75,8 34.75,6.3 35,6.05 R3.1 XP2.2
SPI_CLK: DD1.16 XP1.2 | length 12.4
  Top Layer w0.2: XP1.2 28,10.54 28,12.8 27.85,12.95 DD1.16
SPI_CS_N: DD1.18 R2.1 XP1.1 | length 21.5
  Top Layer w0.2: R2.1 XP1.1 20.42,2.5 24.75,2.5 25.25,3 25.25,6.75 29.25,10.75 DD1.18
SPI_MISO: DD1.19 XP1.4 | length 11
  Top Layer w0.2: XP1.4 26.54,7.54 29.95,10.95 DD1.19
SPI_MOSI: DD1.17 XP1.3 | length 11.5
  Top Layer w0.2: XP1.3 24,6 28.55,10.55 DD1.17
VCC3P3: C7.3 C16.2 C34.2 C35.2 DA1.1 DD1.14 L1.1 L2.1 L3.1 L4.1 L5.1 R2.2 R3.2 R4.2 R19.2 XP2.1 | length 113.8
  Top Layer w0.2: R19.2 C34.2 ; v1@17.5,8.3 v1(17.5,8.25) 17.5,3.25 18.75,2 25,2 25.5,2.5 32.92,2.5 ; R2.2 18.92,8.3 ; XP2.1 32.92,2.5 ; R3.2 36.73,6.95 ; R4.2 36.73,6.95 ; 32.92,2.5 36,2.5 36.73,3.23 36.73,6.95
  Top Layer w0.3: C35.2 4.05,14.7 4.725,14.025 DA1.1 ; L4.1 20,12.498 20.546,11.952 L2.1 ; v1(20,23.5) L5.1 ; DD1.14 26.45,12.8 26.55,12.7 C16.2 26.55,11.25 ; L3.1 v1(35,25) 35.5,25 36,24.5 L1.1
  Top Layer w0.4: C35.2 C34.2 4.05,17 4.3,17.25 6,17.25 7,16.25 7,12 9.73,9.27 C7.3 17.5,8.3 18.92,8.3 24.3,8.3 26.55,10.55 26.55,11.25 ; v1(17.5,12.5) 19.998,12.5 20,12.498
  Bottom Layer w0.4: v1(17.5,8.25) v1(17.5,12.5) 17.5,21 v1(20,23.5) 20.5,24 34,24 v1(35,25)
VCC5P0: C6.3 C33.2 DA1.5 DA1.8 | length 6.9
  Top Layer w0.2: DA1.5 2.775,10.325 2.9,10.2 4.7,10.2 4.725,10.225
  Top Layer w0.3: DA1.8 4.725,10.225 4.95,10 C33.2
  Top Layer w0.4: C33.2 7,9.5 7.19,9.31 C6.3
VCCCP: C4.2 C11.2 C15.2 DD1.6 DD1.10 L4.2 | length 9.3
  Top Layer w0.3: L4.2 20.002,13.95 C15.2 ; DD1.10 22.898,14.35 22.498,13.95 C4.2 C15.2 ; DD1.6 C11.2 21.45,16.45 21,16 C15.2
VCCIN: C2.2 C9.2 C13.2 DD1.12 L2.2 | length 6.3
  Top Layer w0.3: L2.2 21.002,11.05 C2.2 C9.2 C13.2 24.5,11.05 25.05,11.6 DD1.12
VCCPLL: C3.2 C10.2 C14.2 DD1.32 L3.2 | length 6.5
  Top Layer w0.3: DD1.32 29.95,21.846 30.304,22.2 31.2,22.2 32,23 C14.2 C10.2 C3.2 34.998,23.55 L3.2
VCCRF: C5.2 C27.2 C28.2 DD1.40 L5.2 R10.2 R11.2 R12.2 R13.2 | length 18.2
  Top Layer w0.3: v1(21.5,25) 21.5,24.25 21.452,24.202 L5.2 21.45,23.498 C5.2 22.25,22.5 23.35,21.4 DD1.40 ; R13.2 C28.2 ; v1(24,25) C28.2 ; R12.2 C28.2 ; R10.2 C27.2 ; v1(28.75,25) C27.2 ; R11.2 C27.2
  Bottom Layer w0.3: v1(21.5,25) v1(28.75,25)
VCCVCO: C1.2 C8.2 C12.2 DD1.29 L1.2 | length 4.8
  Top Layer w0.3: DD1.29 32.4,19.95 C12.2 C8.2 C1.2 35.998,20.55 L1.2

## Polygon pours and split planes (outlines as drawn)
GND on Bottom Layer "GND_L02_P030" (solid, remove dead copper, pour order 30): 0,0 50,0 50,40 0,40
no net on Bottom Layer "NONET_L02_P028" (solid, remove dead copper, pour order 28): -20.25,22.75
GND on Top Layer "GND_L01_P032" (solid, remove dead copper, pour order 32): 0,40 50,40 50,0 0,0

## Keep-outs
Keep-Out Layer:
  lines w0.1: 0,5 2.5,5 cw(c2.5,2.5) 5,2.5 5,0 ; 0,35 2.5,35 ccw(c2.5,37.5) 5,37.5 5,40 ; 45,0 45,2.5 cw(c47.5,2.5) 47.5,5 50,5 ; 45,40 45,37.5 ccw(c47.5,37.5) 47.5,35 50,35

## Other copper
Top Layer:
  pour cut-out: 24,21 31,21 31,14 24,14
  pour cut-out: 9,16 ccw(c10,16) 10,15 ccw(c10,16) 11,16 ccw(c10,16) 10,17 ccw(c10,16)
  pour cut-out: 9,25 ccw(c10,25) 10,24 ccw(c10,25) 11,25 ccw(c10,25) 10,26 ccw(c10,25)
  pour cut-out: 39,25 ccw(c40,25) 40,24 ccw(c40,25) 41,25 ccw(c40,25) 40,26 ccw(c40,25)
  pour cut-out: 39,37.5 ccw(c40,37.5) 40,36.5 ccw(c40,37.5) 41,37.5 ccw(c40,37.5) 40,38.5 ccw(c40,37.5)
  pour cut-out: 33,37.5 ccw(c34,37.5) 34,36.5 ccw(c34,37.5) 35,37.5 ccw(c34,37.5) 34,38.5 ccw(c34,37.5)
  pour cut-out: 27,37.5 ccw(c28,37.5) 28,36.5 ccw(c28,37.5) 29,37.5 ccw(c28,37.5) 28,38.5 ccw(c28,37.5)
  pour cut-out: 21,37.5 ccw(c22,37.5) 22,36.5 ccw(c22,37.5) 23,37.5 ccw(c22,37.5) 22,38.5 ccw(c22,37.5)
  pour cut-out: 15,37.5 ccw(c16,37.5) 16,36.5 ccw(c16,37.5) 17,37.5 ccw(c16,37.5) 16,38.5 ccw(c16,37.5)
  pour cut-out: 9,37.5 ccw(c10,37.5) 10,36.5 ccw(c10,37.5) 11,37.5 ccw(c10,37.5) 10,38.5 ccw(c10,37.5)
Bottom Layer:
  pour cut-out: 39,25 ccw(c40,25) 40,24 ccw(c40,25) 41,25 ccw(c40,25) 40,26 ccw(c40,25)
  pour cut-out: 39,37.5 ccw(c40,37.5) 40,36.5 ccw(c40,37.5) 41,37.5 ccw(c40,37.5) 40,38.5 ccw(c40,37.5)
  pour cut-out: 33,37.5 ccw(c34,37.5) 34,36.5 ccw(c34,37.5) 35,37.5 ccw(c34,37.5) 34,38.5 ccw(c34,37.5)
  pour cut-out: 27,37.5 ccw(c28,37.5) 28,36.5 ccw(c28,37.5) 29,37.5 ccw(c28,37.5) 28,38.5 ccw(c28,37.5)
  pour cut-out: 21,37.5 ccw(c22,37.5) 22,36.5 ccw(c22,37.5) 23,37.5 ccw(c22,37.5) 22,38.5 ccw(c22,37.5)
  pour cut-out: 15,37.5 ccw(c16,37.5) 16,36.5 ccw(c16,37.5) 17,37.5 ccw(c16,37.5) 16,38.5 ccw(c16,37.5)
  pour cut-out: 9,37.5 ccw(c10,37.5) 10,36.5 ccw(c10,37.5) 11,37.5 ccw(c10,37.5) 10,38.5 ccw(c10,37.5)
  pour cut-out: 9,25 ccw(c10,25) 10,24 ccw(c10,25) 11,25 ccw(c10,25) 10,26 ccw(c10,25)
  pour cut-out: 9,16 ccw(c10,16) 10,15 ccw(c10,16) 11,16 ccw(c10,16) 10,17 ccw(c10,16)

## Silkscreen, mask and mechanical layers (free items; w line width, h text height)
Top Overlay:
  text "-" at 11.5,34 h1
  text "+" at 14.25,34 h1
  text "A_D" at 47.25,7.25 h1.5
  text ".PCB_Week" at 47.25,5.75 h1.5
  text "5.0V" at 5.75,1.75 h1.25
  text "3.3V" at 8.5,1.75 h1.25
  text "GND" at 11.25,1.75 h1.25
  text "GND" at 14,1.75 h1.25
  text "CS" at 18,1.75 h1.25
  text "CLK" at 20,1.75 h1.25
  text "MOSI" at 22.5,1.75 h1.25
  text "MISO" at 25.5,1.75 h1.25
  text "GND" at 28.5,1.75 h1.25
  text "3.3V" at 31.5,1.75 h1.25
  text "RST" at 34.25,1.75 h1.25
  text "PD" at 37,1.75 h1.25
  text "MUTE" at 39,1.75 h1.25
  text "GND" at 42.5,1.75 h1.25
Bottom Overlay:
  text "JLCJLCJLCJLC" at 0.5,5.75 h1.5 r270
Top Solder:
  region: 0,0 5,0 5,2.5 ccw(c2.5,2.5) 2.5,5 0,5
  region: 50,0 45,0 45,2.5 cw(c47.5,2.5) 47.5,5 50,5
  region: 50,40 45,40 45,37.5 ccw(c47.5,37.5) 47.5,35 50,35
  region: 0,40 5,40 5,37.5 cw(c2.5,37.5) 2.5,35 0,35
Bottom Solder:
  region: 0,0 5,0 5,2.5 ccw(c2.5,2.5) 2.5,5 0,5
  region: 50,0 45,0 45,2.5 cw(c47.5,2.5) 47.5,5 50,5
  region: 50,40 45,40 45,37.5 ccw(c47.5,37.5) 47.5,35 50,35
  region: 0,40 5,40 5,37.5 cw(c2.5,37.5) 2.5,35 0,35
1 - Board Outline:
  the board outline again, w0.2